# Altium PCB ESP32_C3_Breakout.PcbDoc
Units mm, origin at the board's own origin, x right, y up, seen from the top; angles counter-clockwise.
Board outline 103.38 x 55.12 mm, 2 copper layers (Top Layer, Bottom Layer); 77 components, 40 nets, 279 pads, 103 vias.
Unrouted connection lines stored in the file: 3.
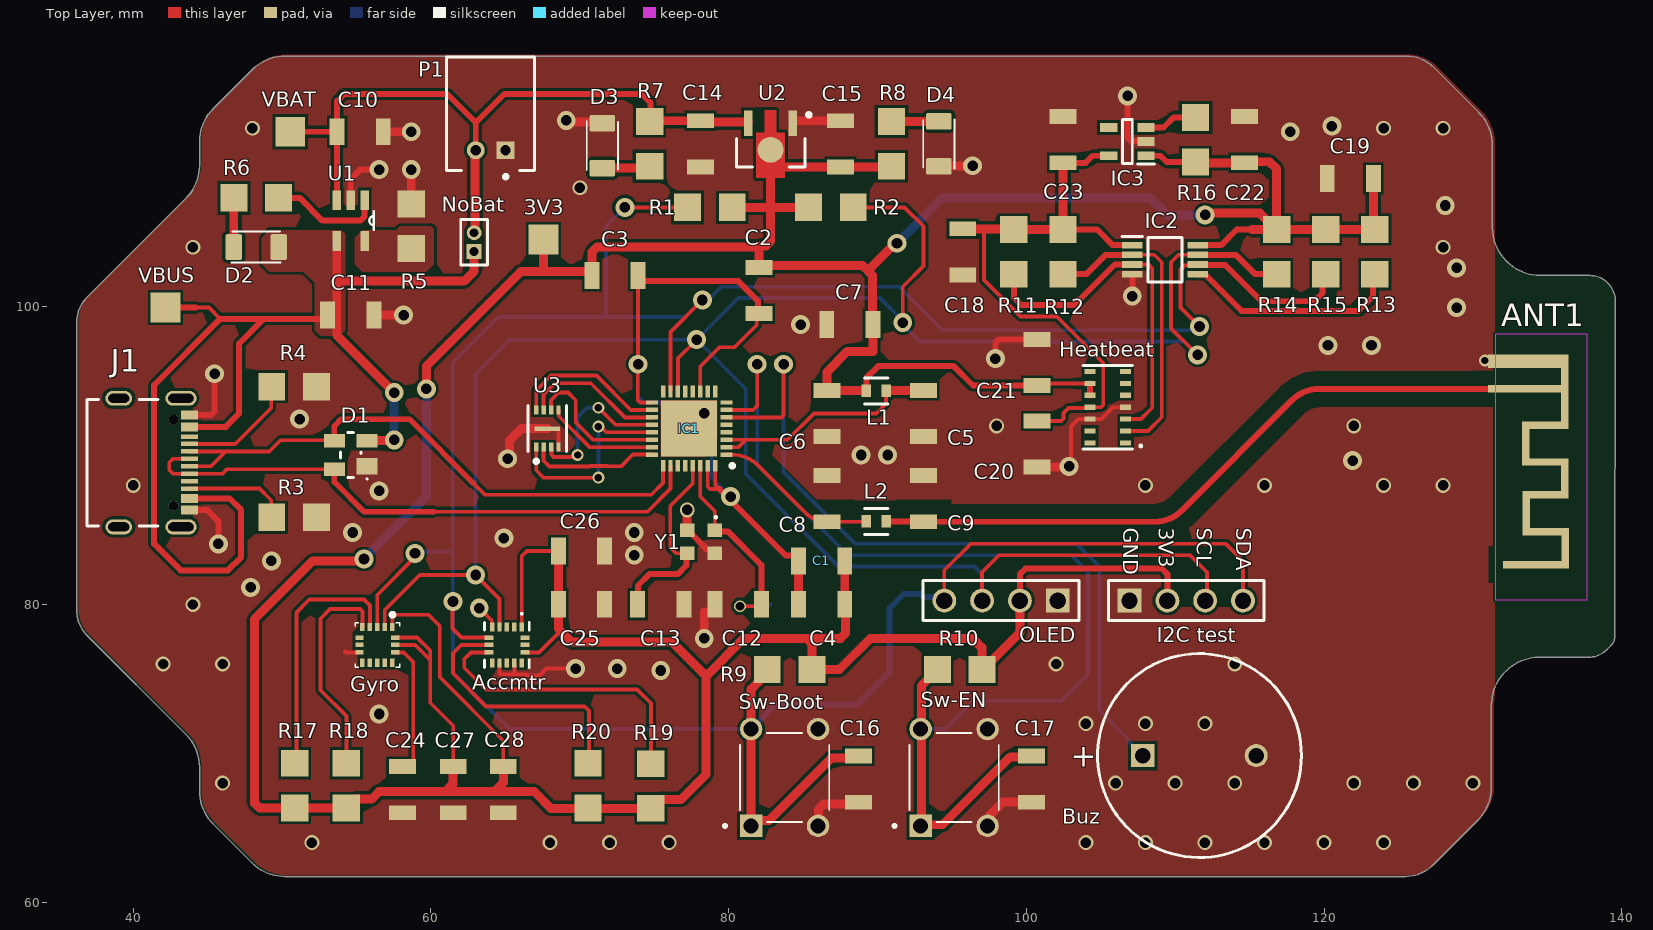
[diagram p0: Top Layer view]
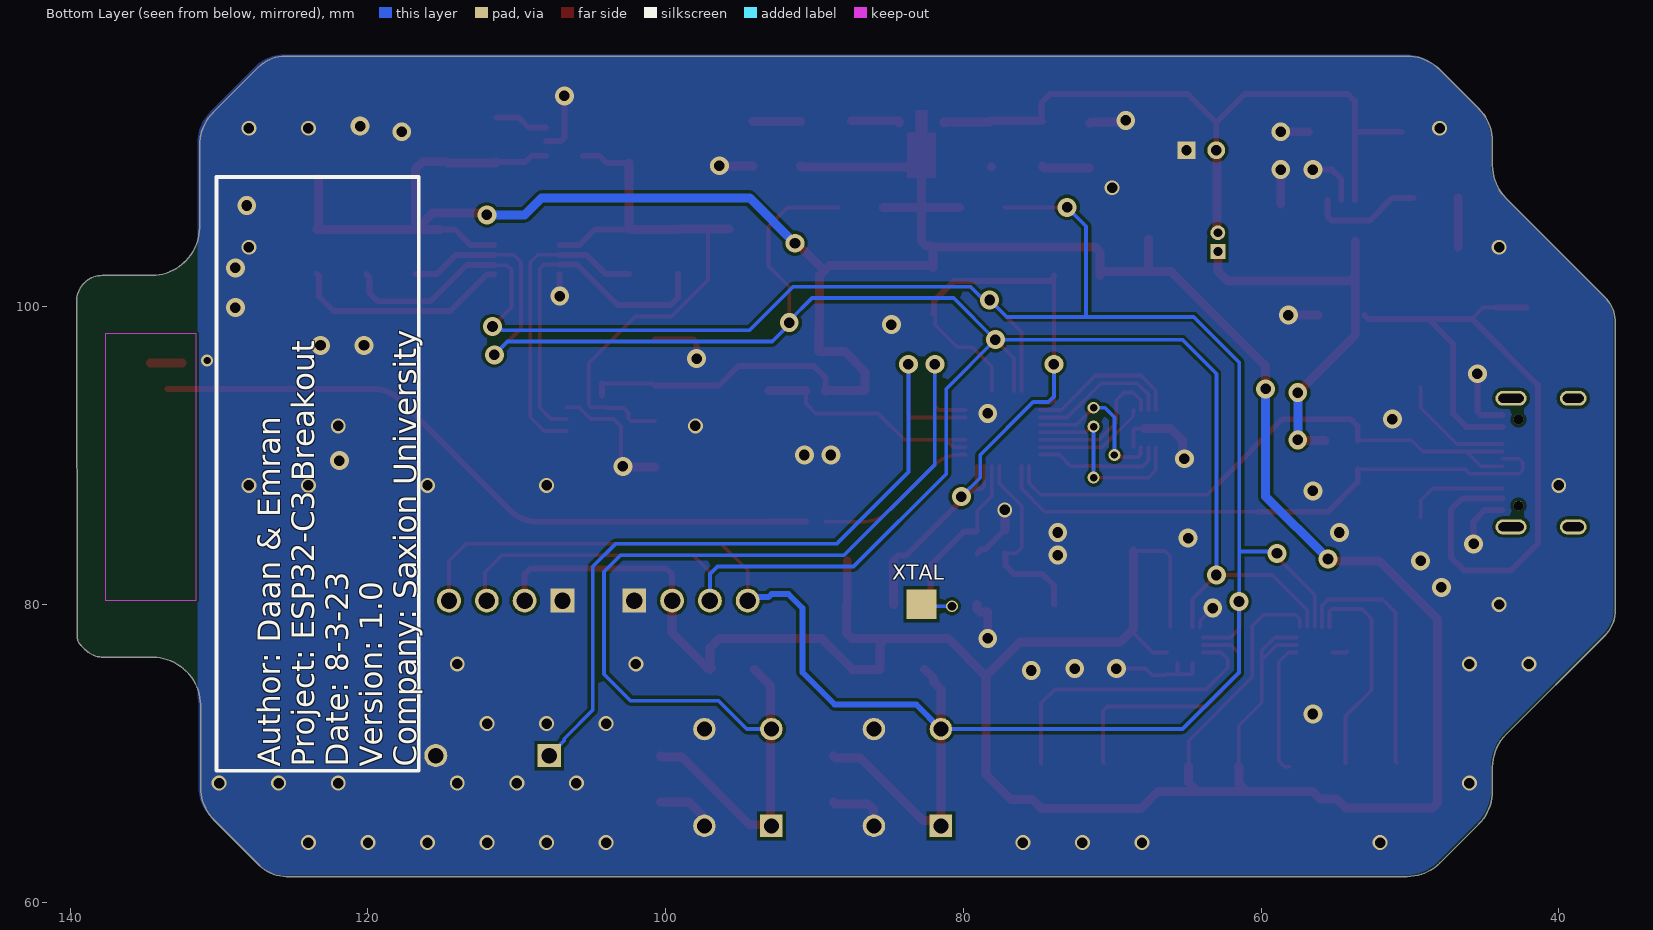
[diagram p1: Bottom Layer view, seen from below]
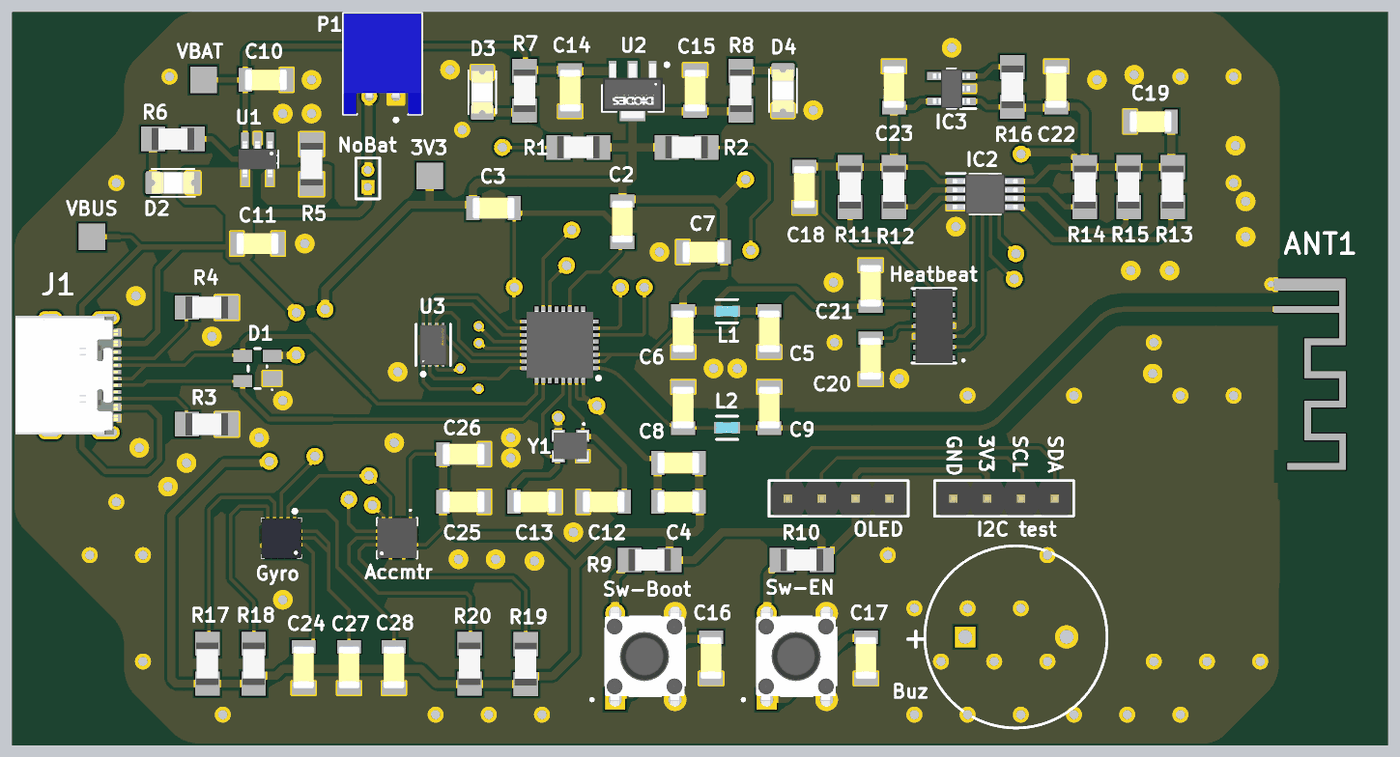
[diagram p2: 3D render of the assembled board from above, using the file's embedded part models]

## Layer stack, top to bottom
Top Solder: solder mask 0.0102, Solder Resist, Dk 3.5
Top Layer: signal copper 0.0356
Dielectric 1: dielectric 0.32, FR-4, Dk 4.8
Bottom Layer: signal copper 0.0356
Bottom Solder: solder mask 0.0102, Solder Resist, Dk 3.5

## Board outline
44.45,67.462 44.45,69.063 ccw(c41.323,69.063) 43.534,71.274 36.913,77.895 cw(c38.648,79.629) 36.195,79.629 36.195,98.933 cw(c38.648,98.933) 36.913,100.667 43.534,107.288 ccw(c41.323,109.499) 44.45,109.499 44.45,111.1 cw(c47.577,111.1) 45.366,113.311 47.979,115.924 cw(c50.19,113.713) 50.19,116.84 125.544,116.84 cw(c125.544,114.246) 127.379,116.08 130.402,113.057 cw(c128.191,110.846) 131.318,110.846 131.318,105.308 ccw(c134.445,105.308) 132.234,103.097 132.307,103.024 ccw(c134.518,105.235) 134.518,102.108 137.839,102.108 cw(c137.839,100.374) 139.065,101.6 cw(c137.839,100.374) 139.573,100.374 139.539,77.858 cw(c138.686,77.858) 139.29,77.255 139.216,77.182 139.07,77.035 138.997,76.962 cw(c137.77,78.188) 137.77,76.454 134.45,76.454 ccw(c134.45,73.327) 132.239,75.538 132.166,75.465 ccw(c134.377,73.254) 131.25,73.254 131.25,67.716 cw(c128.122,67.716) 130.334,65.505 127.311,62.482 cw(c125.476,64.316) 125.476,61.722 50.19,61.722 cw(c50.19,64.849) 47.979,62.638 45.366,65.251 cw(c47.577,67.462)

## Design rules (kind name [scope] priority, off if disabled: settings)
Clearance Clearance_2 [InNet('RF2') vs InNet('GND')] p1: gap=1 ignorepadtopadclearanceinfootprint=FALSE
Clearance Clearance_1 [InNet('RF1') vs InNet('GND')] p2: gap=1 ignorepadtopadclearanceinfootprint=FALSE
Clearance [All] p3: gap=0.2 ignorepadtopadclearanceinfootprint=FALSE
DiffPairsRouting [All] p1: maxlimit=0.254 minlimit=0.2 mostfreqgap=0.254 toplayer_minwidth=0.254 toplayer_maxwidth=0.381 toplayer_prefwidth=0.381 bottomlayer_minwidth=0.254 bottomlayer_maxwidth=0.381 bottomlayer_prefwidth=0.381 maxuncoupledlength=12.7
PolygonConnect [All] p1: connectstyle=Direct reliefconductorwidth=0.254 reliefentries=4 polygonreliefangle="90 Angle" airgapwidth=0.254
RoutingVias [All] p1: holewidth=0.711 width=1.27 viastyle="Through Hole" minholewidth=0.711 minwidth=1.27 maxholewidth=0.711 maxwidth=1.27
SolderMaskExpansion [All] p1: expansion=0.102 istentingtop=FALSE
Width [All] p1: maxlimit=0.6 minlimit=0.254 preferedwidth=0.4 minimp=50.000000 maximp=50.000000 favimp=50.000000
29 further rules are at their usual default settings.

## Classes and differential pairs
component class Sensors: Accmtr C18 C19 C20 C21 C22 C23 C24 C25 C26 C27 C28 Gyro Heatbeat IC2 IC3 R11 R12 R13 R14 R15 R16 R17 R18 R19 R20
component class IC_Schematic: 3V3 ANT1 Buz C1 C2 C3 C4 C5 C6 C7 C8 C9 C10 C11 C12 C13 C14 C15 C16 C17 D1 D2 D3 D4 "I2C test" IC1 J1 L1 L2 NoBat OLED P1 R1 R2 R3 R4 R5 R6 R7 R8 R9 R10 Sw-Boot Sw-EN U1 U2 U3 VBAT VBUS XTAL Y1
differential pair D_USB: +D_USB_P -D_USB_N

## Components (designator, comment, footprint, x,y, rotation, side; value= is the part's Value field where it differs from the comment)
3V3 "Pad" PAD_SQ_2MM#1 67.564,104.521 r0 top
Accmtr "LIS3DHTR" LIS3DHTR 65.104,77.28 r270 top (schematic designator AC1)
ANT1 "Antenna 2.4Ghz 50Ohm PCB" PCB_Antenna_2.4GHz_50Ohm 133.954,89.678 r270 top
Buz "KPEG242" KINGS-KPEG242-2 111.633,69.85 r0 top
C1 "10u" CAP_1206 86.252,82.931 r0 top
C2 "100n" CAP_1206 82.042,101.092 r90 top
C3 "100n" CAP_1206 72.364,102.108 r180 top
C4 "100n" CAP_1206 86.252,80.01 r0 top
C5 "100n" CAP_1206 93.091,92.837 r90 top
C6 "100n" CAP_1206 86.614,92.837 r90 top
C7 "10u" CAP_1206 88.138,98.806 r0 top
C8 "3p3" CAP_1206 86.614,87.109 r270 top
C9 "3p3" CAP_1206 93.091,87.109 r270 top
C10 "4u7" CAP_1206 55.245,111.76 r180 top
C11 "4u7" CAP_1206 54.61,99.441 r180 top
C12 "27p" CAP_1206 80.645,80.01 r0 top
C13 "27p" CAP_1206 75.438,80.01 r180 top
C14 "10u" CAP_1206 78.117,110.95 r90 top
C15 "22u" CAP_1206 87.515,110.95 r270 top
C16 "10n" CAP_1206 88.714,68.267 r90 top
C17 "10n" CAP_1206 100.354,68.267 r90 top
C18 "100n" CAP_1206 95.73,103.692 r90 top
C19 "100n" CAP_1206 121.765,108.621 r0 top
C20 "1u" CAP_1206 100.711,90.779 r90 top
C21 "1u" CAP_1206 100.711,96.266 r270 top
C22 "1u" CAP_1206 114.664,111.225 r270 top
C23 "1u" CAP_1206 102.461,111.225 r270 top
C24 "10n" CAP_1206 58.078,67.555 r270 top
C25 "10u" CAP_1206 70.109,80.01 r180 top
C26 "10u" CAP_1206 70.109,83.592 r180 top
C27 "10u" CAP_1206 61.5,67.555 r90 top
C28 "10u" CAP_1206 64.862,67.555 r90 top
D1 "SP0503BAHTG" LFUS-SOT143-4_V 54.61,90.043 r180 top
D2 "LED BAT" LED_1206 48.26,104.013 r0 top
D3 "LED VBUS" LED_1206 71.513,110.823 r270 top
D4 "LED 3.3V" LED_1206 94.119,110.95 r90 top
Gyro "L3GD20HTR" H3LIS100DLTR 56.398,77.28 r270 top (schematic designator IC5)
Heatbeat "MAX30102EFD+" 14-LEAD-OESIP 105.467,93.256 r180 top (schematic designator IC2)
"I2C test" "61300411121" 61300411121 110.744,80.264 r0 top
IC1 "ESP32-C3" QFN50P500X500X90-33N-D 77.343,91.821 r180 top
IC2 "PCA9517ADMR2G" SOP65P490X110-8N 109.319,103.167 r0 top
IC3 "LDLN025M18R" SOT95P280X145-5N 106.79,111.098 r180 top
J1 "USB4105-GF-A-060" USB4105-GF-A-060 41.402,89.535 r270 top
L1 "2n2" FP-LQW18AN_10-MFG 89.916,94.349 r180 top
L2 "2n2" FP-LQW18AN_10-MFG 89.916,85.585 r0 top
NoBat "VBUS" MHDR1X2 62.902,103.705 r90 top (schematic designator P2)
OLED "61300411121" 61300411121 98.298,80.264 r180 top (schematic designator OLED1)
P1 "Bat" JST-S2B-PH-K-S_V 64.008,112.973 r180 top
R1 "2k2" RES_1206 78.74,106.68 r180 top
R2 "2k2" RES_1206 86.868,106.68 r0 top
R3 "5k1" RES_1206 50.8,85.852 r180 top
R4 "5k1" RES_1206 50.8,94.635 r180 top
R5 "22k" RES_1206 58.674,105.41 r270 top
R6 "470" RES_1206 48.26,107.315 r180 top
R7 "10k" RES_1206 74.688,110.95 r90 top
R8 "10k" RES_1206 90.944,110.95 r270 top
R9 "10k" RES_1206 84.098,75.633 r180 top
R10 "10k" RES_1206 95.528,75.633 r180 top
R11 "10k" RES_1206 99.159,103.692 r270 top
R12 "10k" RES_1206 102.461,103.692 r270 top
R13 "10k" RES_1206 123.416,103.692 r270 top
R14 "10k" RES_1206 116.812,103.692 r270 top
R15 "10k" RES_1206 120.114,103.692 r270 top
R16 "10k" RES_1206 111.362,111.225 r90 top
R17 "10k" RES_1206 50.844,67.83 r270 top
R18 "10k" RES_1206 54.32,67.83 r270 top
R19 "4k7" RES_1206 74.776,67.806 r90 top
R20 "22k" RES_1206 70.549,67.83 r90 top
Sw-Boot "SWEN" "Switch/Button 4 Pin Through Hole" 83.758,68.378 r90 top (schematic designator S1)
Sw-EN "SWEN" "Switch/Button 4 Pin Through Hole" 95.148,68.378 r90 top (schematic designator S2)
U1 "MCP73831T-3ACI/OT" SOT95P270X145-5N 54.61,105.791 r270 top
U2 "AZ1117CR-3.3TRG1" FP-SOT89-MFG 82.816,110.696 r180 top
U3 "W25Q16JVUXIQ" FP-UX-MFG 67.818,91.821 r90 top
VBAT "Pad" PAD_SQ_2MM#1 50.546,111.76 r90 top
VBUS "Pad" PAD_SQ_2MM#1 42.164,99.949 r90 top
XTAL "Pad" PAD_SQ_2MM#2 82.804,80.01 r90 top
Y1 "8Z-40.000MAAJ-T" 8Z40000MAAJT 78.141,84.214 r180 top

## Footprints (in the part's own frame and the unit in brackets; to place one, negate y for a bottom-side part, rotate by r counter-clockwise, add the part's x,y. Pads: shape width x height; smd on the part's side, far side on the other; paste and mask are expansions set on the pad)
8Z40000MAAJT [mm]
  rect 1x0.9 smd: 1(-0.925,-0.775) 2(0.925,-0.775) 3(0.925,0.775) 4(-0.925,0.775)
  silkscreen extent -1.05,-1.7 -0.95,-1.6, body extent -1.34,-1.13 1.34,1.13, height 0.65
14-LEAD-OESIP [mm]
  rect 0.75x0.35 smd: 1(-1.2,2.4) 2(-1.2,1.6) 3(-1.2,0.8) 4(-1.2,0) 5(-1.2,-0.8) 6(-1.2,-1.6) 7(-1.2,-2.4) 8(1.2,-2.4) 9(1.2,-1.6) 10(1.2,-0.8) 11(1.2,0) 12(1.2,0.8) 13(1.2,1.6) 14(1.2,2.4)
  silkscreen extent -2.28,-2.8 1.65,2.8, body extent -1.4,-2.8 1.4,2.8, height 1.3
61300411121 [mm] "Pin Header, pitch 2.54 mm, THT, Vertical, single row, 4p"
  rect 1.6x1.6 hole 1.1: 1(-3.81,0)
  round 1.6 hole 1.1: 2(-1.27,0) 3(1.27,0) 4(3.81,0)
  silkscreen extent -5.23,-1.35 5.23,1.35, body extent -5.08,-1.27 5.08,1.27, height 8.57
CAP_1206 [mm]
  rect 1x1.8 smd: 1(-1.55,0) 2(1.55,0)
  body extent -1.6,-0.8 1.6,0.8, height 0.94
FP-LQW18AN_10-MFG [mm]
  rect 0.625x0.85 smd paste+0 mask+0: 1(-0.663,0) 2(0.663,0)
  silkscreen extent -0.8,-0.87 0.8,0.87, body extent -1.07,-0.65 1.07,0.65, height 0.25
FP-SOT89-MFG [mm]
  rect 0.58x1.73 smd paste+0 mask+0: 1(-1.5,-1.635) 3(1.5,-1.635)
  round 1.74 smd paste+0 mask+0: 2(0,0.146)
  Top Layer region: -0.38,-2.5 -0.38,-1 -0.967,-1 -0.967,2.03 0.967,2.03 0.967,-1 0.38,-1 0.38,-2.5
  silkscreen extent -2.7,-2.32 2.3,1.3, body extent -2.4,-2.6 2.4,2.13, height 0.25
FP-UX-MFG [mm]
  rect 0.6x0.3 smd paste-1000 mask-1000: 1(-1.25,0.75) 2(-1.25,0.25) 3(-1.25,-0.25) 4(-1.25,-0.75) 5(1.25,-0.75) 6(1.25,-0.25) 7(1.25,0.25) 8(1.25,0.75)
  rect 0.3x1.7 smd paste-1000 mask+0: 9(0,0)
  silkscreen extent -2.32,-1.3 1.55,1.3, body extent -1.75,-1.15 1.75,1.15, height 0.25
H3LIS100DLTR [mm]
  rect 0.55x0.3 smd: 1(-1.2,1) 2(-1.2,0.5) 3(-1.2,0) 4(-1.2,-0.5) 5(-1.2,-1) 9(1.2,-1) 10(1.2,-0.5) 11(1.2,0) 12(1.2,0.5) 13(1.2,1)
  rect 0.3x0.55 smd: 6(-0.5,-1.2) 7(0,-1.2) 8(0.5,-1.2) 14(0.5,1.2) 15(0,1.2) 16(-0.5,1.2)
  silkscreen extent -2.16,-1.5 1.5,1.5, body extent -1.5,-1.5 1.5,1.5, height 1
JST-S2B-PH-K-S_V [mm] "THD, 2-Leads, Body 7.6x5.9mm, Pitch 2mm"
  rect 1.2x1.2 hole 0.7: 1(-1,2.45)
  round 1.2 hole 0.7: 2(1,2.45)
  silkscreen extent -2.95,-3.8 2.95,4.35, body extent -2.95,-3.8 2.95,3.8, height 4.8
KINGS-KPEG242-2 [mm] "THD, 2-Leads, Dia 13.7mm, Pitch 7.62mm"
  rect 1.55x1.55 hole 1.05: 1(-3.81,0)
  round 1.55 hole 1.05: 2(3.81,0)
  silkscreen extent -6.85,-6.85 6.85,6.85, body extent -6.85,-6.85 6.85,6.85, height 7.6
LED_1206 [mm]
  rrect20% 1.1x1.73 smd: A(1.51,0) C(-1.51,0)
  silkscreen extent -1.65,-1.04 1.65,1.04, body extent -1.6,-0.8 1.6,0.8, height 1.1
LFUS-SOT143-4_V [mm] "SOT143, 4-Leads, Body 3.04x1.4mm, Pitch 1.90mm"
  rect 1.4x1.1 smd: 1(-1.1,0.75)
  rect 1.4x0.9 smd: 2(-1.1,-0.95) 3(1.1,-0.95) 4(1.1,0.95)
  silkscreen extent -1.15,-1.5 0.7,1.65, body extent -0.7,-1.52 0.7,1.52, height 1.22
LIS3DHTR [mm]
  rect 0.6x0.3 smd: 1(-1.2,1) 2(-1.2,0.5) 3(-1.2,0) 4(-1.2,-0.5) 5(-1.2,-1) 9(1.2,-1) 10(1.2,-0.5) 11(1.2,0) 12(1.2,0.5) 13(1.2,1)
  rect 0.3x0.6 smd: 6(-0.5,-1.2) 7(0,-1.2) 8(0.5,-1.2) 14(0.5,1.2) 15(0,1.2) 16(-0.5,1.2)
  silkscreen extent -2.16,-1.5 1.5,1.5, body extent -1.5,-1.5 1.5,1.5, height 1
MHDR1X2 [mm] "Connector; Header; 2 Position"
  rect 1x1 hole 0.6: 1(0,0)
  round 1 hole 0.6: 2(1.27,0)
  silkscreen extent -0.9,-0.9 2.17,0.9
PAD_SQ_2MM#1 [mm]
  rect 2x2 smd: 1(0,0)
PAD_SQ_2MM#2 [mm]
  rect 2x2 smd far side: 1(0,0)
PCB_Antenna_2.4GHz_50Ohm [mm]
  rect 0.5x4.9 smd paste+0: 1(-4.81,-0.477)
  rect 5x0.5 smd: 1(-4.623,2.214)
  rect 0.5x2.64 smd paste+0: 1(-2.375,0.674) 1(0.104,0.673) 1(2.307,0.686) 1(4.794,0.689)
  rect 2x0.5 smd: 1(-1.136,-0.397) 1(3.551,-0.38)
  rect 2.7x0.5 smd: 1(1.205,2.232) 1(5.894,2.251)
  rect 0.5x3.94 smd paste+0: 1(6.995,0.056)
  rect 0.9x4.9 smd paste+0: 2(-6.672,-0.471)
  Keep-Out Layer region: 9.398,-2.413 -8.509,-2.413 -8.509,3.683 9.398,3.683
QFN50P500X500X90-33N-D [mm]
  rect 0.8x0.3 smd: 1(-2.5,1.75) 2(-2.5,1.25) 3(-2.5,0.75) 4(-2.5,0.25) 5(-2.5,-0.25) 6(-2.5,-0.75) 7(-2.5,-1.25) 8(-2.5,-1.75) 17(2.5,-1.75) 18(2.5,-1.25) 19(2.5,-0.75) 20(2.5,-0.25) 21(2.5,0.25) 22(2.5,0.75) 23(2.5,1.25) 24(2.5,1.75)
  rect 0.3x0.8 smd: 9(-1.75,-2.5) 10(-1.25,-2.5) 11(-0.75,-2.5) 12(-0.25,-2.5) 13(0.25,-2.5) 14(0.75,-2.5) 15(1.25,-2.5) 16(1.75,-2.5) 25(1.75,2.5) 26(1.25,2.5) 27(0.75,2.5) 28(0.25,2.5) 29(-0.25,2.5) 30(-0.75,2.5) 31(-1.25,2.5) 32(-1.75,2.5)
  rect 3.75x3.75 smd: 33(0,0)
  silkscreen extent -3.03,2.38 -2.78,2.62, body extent -2.55,-2.55 2.55,2.55, height 0.9
RES_1206 [mm]
  rect 1.8x1.84 smd: 1(-1.5,0) 2(1.5,0)
  body extent -1.6,-0.83 1.6,0.83, height 0.57
SOP65P490X110-8N [mm]
  rect 1.4x0.45 smd: 1(-2.2,0.975) 2(-2.2,0.325) 3(-2.2,-0.325) 4(-2.2,-0.975) 5(2.2,-0.975) 6(2.2,-0.325) 7(2.2,0.325) 8(2.2,0.975)
  silkscreen extent -2.9,-1.5 1.15,1.55, body extent -2.45,-1.5 2.45,1.5, height 1.1
SOT95P270X145-5N [mil]
  rect 52x22 smd: 1(-54,37) 2(-54,0) 3(-54,-37) 4(54,-37) 5(54,37)
  silkscreen extent -25,49 25,61, body extent -53,-57 53,57, height 57
SOT95P280X145-5N [mm]
  rect 1.15x0.6 smd: 1(-1.25,0.95) 2(-1.25,0) 3(-1.25,-0.95) 4(1.25,-0.95) 5(1.25,0.95)
  silkscreen extent -1.83,-1.48 0.33,1.5, body extent -1.4,-1.48 1.4,1.48, height 1.45
"Switch/Button 4 Pin Through Hole" [mm]
  rect 1.508x1.508 / inner round 1.508 / far side rect 1.508x1.508 hole 1: 1(-3.25,2.25)
  round 1.508 hole 1: 2(3.25,2.25) 3(-3.25,-2.25) 4(3.25,-2.25)
  silkscreen extent -3.35,-3 3,4.1, body extent -3.95,-2.95 3.95,3.05, height 12
USB4105-GF-A-060 [mm]
  rect 0.6x1.15 smd mask+0.05: A1B12(-3.2,2.378) A4B9(-2.4,2.378) B1A12(3.2,2.378) B4A9(2.4,2.378)
  rect 0.3x1.15 smd mask+0.05: A5(-1.25,2.378) A6(-0.25,2.378) A7(0.25,2.378) A8(1.25,2.378) B5(1.75,2.378) B6(0.75,2.378) B7(-0.75,2.378) B8(-1.75,2.378)
  round 0.65 hole 0.65 unplated mask+0.05: MH(-2.89,1.303) MH(2.89,1.303)
  oval 1x2.1 hole 0.6 slot 1.7 at 90 deg: SH(-4.32,1.803) SH(4.32,1.803)
  oval 1x1.8 hole 0.6 slot 1.4 at 90 deg: SH(-4.32,-2.377) SH(4.32,-2.377)
  silkscreen extent -4.25,-4.5 4.25,0.25, body extent -4.47,-4.97 4.47,2.73, height 3.27

## Part data
3V3 VBAT VBUS XTAL: library part PAD_SQ_2MM, "Test Point Square 2mm"
Accmtr: "Accelerometer", Manufacturer_Name=STMicroelectronics, Mouser Part Number=511-LIS3DHTR, Arrow Part Number=LIS3DHTR, Arrow Price/Stock=https://www.arrow.com/en/products/lis3dhtr/stmicroelectronics, Datasheet Link=http://www.st.com/content/ccc/resource/technical/document/datasheet/3c/ae/50/85/d6/b1/46/fe/CD00274221.pdf/files/CD00274221.pdf/jcr:content/translations/en.CD00274221.pdf, Height=1mm, Manufacturer_Part_Number=LIS3DHTR, Mouser Price/Stock=https://www.mouser.co.uk/ProductDetail/STMicroelectronics/LIS3DHTR?qs=6la6oa3D8xzhXYax3cEo4w%3D%3D
ANT1: "ESP32 C3"
Buz: library part CMP-2000-06518-1, "Piezo Indicator, 4100 Hz, 3 to 16 V, -20 to 70 degC, 2-Pin THD, RoHS", Current - Max=7A, Frequency Range=3600to4600Hz, Manufacturer=KingstateElectronicsCorp., Maximum Resonant Frequency=4600Hz, Maximum Supply Current=7mA, Operating Temperature=-20to70°C, Package Description="2-Pin Through Hole Device, Body Dia 13.7 mm, Pitch 7.62 mm", PartNumber=KPE-242, Typical Operating Supply Voltage=12Vdc, Category=AudioIndicatorsandAlerts, Datasheet URL=https://datasheet.ciiva.com/11776/0900766b8068f3a2-11776713.pdf, Datasheet Version=01/2006, Manufacturer URL=http://www.kingstate.com.tw/index.php/en/, Minimum Sound Pressure=70dBA, Mounting=ThroughHole, Mounting Technology=ThroughHole, Package Reference=KPEG242, Product Diameter=13.7mm, Product Height=7.6mm, Technology=Piezo, Termination Method=Pin, Tone Mode=Continuous, Type=Indicator
C1 C2 C3 C4 C5 C6 C7 C8 C9 C10 C11 C12 C13 C14 C15 C16 C17 C24 C25 C26 C27 C28: library part CAP_1206_50V, "Capacitor SMD 1206 50V"
C18 C19 C20 C21 C22 C23: library part CAP_1206_16V, "Capacitor SMD 1206 16V"
D1: library part CMP-2000-05191-1, "TVS Diode Array, 30 pF, 30 KV, -40 to 85 degC, 4-Pin SOT143, RoHS, Tape and Reel", Capacitance Value=30pF, Clamping Voltage=8V, Leakage Current=0.1uA, Manufacturer=Littelfuse, Operating Temp Range=-40Cto85C, Operating Temperature Classification=Industrial, Operating Temperature Max Deg. C=85C, Operating Temperature Min Deg. C=-40C, Package / Case=SOT-143, Reverse Stand-off Voltage=5.5(Min)V, Working Voltage=5.5V, Working Voltage (Max)=5.5V(Min), Clamping Voltage (Max)=8V, Configuration=Triple, Datasheet URL=https://datasheet.ciiva.com/15143/getdatasheetpartid-116020-15143550.pdf, Datasheet Version=Dec-13, Direction Type=Uni-Directional, Leakage Current (Max)=0.1uA, Manufacturer URL=http://www.littelfuse.com/, Mounting=SurfaceMount, Mounting Style=SurfaceMount, Number of Elements=3, Package Type=SOT-143, Packaging=TapeandReel, Pin Count=3+Tab, Polarity=Uni-Directional, Product Depth (mm)=1.4mm, Product Height (mm)=1.05mm, Product Length (mm)=3.04mm, Rad Hardened=No, Suppressor Type=TVS
D2 D3 D4: library part "LED - 1206", "Yellow 587nm LED Indication - Discrete 2V 1206 _3216 Metric_", Package="1206 Lite-On", Availability=Unavailable, MF="Lite-On Inc.", MP=LTST-C230KSKT, Price=None, SnapEDA_Link=https://www.snapeda.com/parts/LTST-C230KSKT/Lite-On%20Inc./view-part/264912/?ref=snap
Gyro: "MEMS motion sensor: /  three-axis digital output gyroscope", Manufacturer_Name=STMicroelectronics, Mouser Part Number=511-L3GD20HTR, Arrow Part Number=L3GD20HTR, Arrow Price/Stock=https://www.arrow.com/en/products/l3gd20htr/stmicroelectronics, Datasheet Link=http://www.st.com/content/ccc/resource/technical/document/datasheet/35/b1/e0/39/71/57/43/01/DM00060659.pdf/files/DM00060659.pdf/jcr:content/translations/en.DM00060659.pdf, Height=1mm, Manufacturer_Part_Number=L3GD20HTR, Mouser Price/Stock=https://www.mouser.co.uk/ProductDetail/STMicroelectronics/L3GD20HTR?qs=7v3IMFVTeKNoM%2F2Sb4QSlQ%3D%3D
Heatbeat: "Integrated Circuit", Manufacturer_Name="Analog Devices", Mouser Part Number=700-MAX30102EFD+, Datasheet Link=https://datasheets.maximintegrated.com/en/ds/MAX30102.pdf, Manufacturer_Part_Number=MAX30102EFD+, Mouser Price/Stock=https://www.mouser.co.uk/ProductDetail/Maxim-Integrated/MAX30102EFD%2b?qs=nVS1qgv%252BQrk9UYEvS27V%2Fg%3D%3D
"I2C test" OLED: library part CMP-1502-01064-1, "THT Vertical Pin Header WR-PHD, Pitch 2.54 mm, Single Row, 4 pins", Contact Resistance=20mOhm, Manufacturer="Wurth Elektronik", Operating Temperature=-40to105degC, Rated Current=3A, Withstanding Voltage=500VAC, Working Voltage=250VAC, Datasheet URL=https://katalog.we-online.de/em/datasheet/6130xx11121.pdf, Gender=Male, Manufacturer URL=http://www.we-online.de, Mounting Technology=THT, Orientation=Vertical, Package Reference=61300411121, Packaging=Bag, Part Number=61300411121, Pin Number=4, Pitch=2.54mm, Publisher=WurthElektronik, Row Number=Single
IC1: "Integrated Circuit", Manufacturer_Name="Espressif Systems", Mouser Part Number=356-ESP32-C3, Datasheet Link=https://www.espressif.com/sites/default/files/documentation/esp32-c3_datasheet_en.pdf, Height=0.9mm, Manufacturer_Part_Number=ESP32-C3, Mouser Price/Stock=https://www.mouser.co.uk/ProductDetail/Espressif-Systems/ESP32-C3?qs=iLbezkQI%252BsiMXe7tMG%252Bo%2FA%3D%3D
IC2: "Integrated Circuit", Manufacturer_Name=onsemi, Mouser Part Number=863-PCA9517ADMR2G, Arrow Part Number=PCA9517ADMR2G, Arrow Price/Stock=https://www.arrow.com/en/products/pca9517admr2g/on-semiconductor?region=nac, Datasheet Link=https://www.arrow.com/en/products/pca9517admr2g/on-semiconductor, Height=1.1mm, Manufacturer_Part_Number=PCA9517ADMR2G, Mouser Price/Stock=https://www.mouser.co.uk/ProductDetail/onsemi/PCA9517ADMR2G?qs=tCMd4XlZ%2FiBws0nQ3cmpKw%3D%3D
IC3: "Integrated Circuit", Manufacturer_Name=STMicroelectronics, Mouser Part Number=511-LDLN025M18R, Arrow Part Number=LDLN025M18R, Arrow Price/Stock=https://www.arrow.com/en/products/ldln025m18r/stmicroelectronics, Datasheet Link=https://mouser.componentsearchengine.com/Datasheets/2/LDLN025M18R.pdf, Height=1.45mm, Manufacturer_Part_Number=LDLN025M18R, Mouser Price/Stock=https://www.mouser.co.uk/ProductDetail/STMicroelectronics/LDLN025M18R?qs=5aG0NVq1C4xLjfzI8y7cFQ%3D%3D
J1: "USB Connector Type C SMT 12 Pin", Manufacturer=GCT, Manufacturer Part Number=USB4105-GF-A-060
L1 L2: library part CMP-06042-001078-1, "Wire Wound RF Inductor for Automotive 2.2nH ±0.5nH 1400mA 0.018Ω 0603 (1608)"
NoBat: library part MHDR1X2, "Header, 2-Pin", LatestRevisionDate=17-Jul-2002, LatestRevisionNote="Re-released for DXP Platform.", Publisher="Altium Limited"
P1: library part CMP-1755-00004-1, "Male Header, Pitch 2 mm, 1 x 2 Position, Height 4.8 mm, Tail Length 3.4 mm, -25 to 85 degC, RoHS, Bulk", Capacitance="10 uF", Case\Package=Radial, Max Operating Temperature="85 degC", Min Operating Temperature="-40 degC", Package Quantity=200, Tolerance=20%, Voltage Rating="50 V", ComponentLink1Description=Datasheet, ComponentLink1URL=http://www.jst-mfg.com/product/pdf/eng/ePH.pdf, DatasheetVersion=Dec-12, Diameter="5 mm", Height="11 mm", Lead Pitch="2 mm", Length="11 mm", Mount="Through Hole", PackageDescription="Male Header, Pitch 2 mm, 1 x 2 Position, Height 4.8 mm, Tail Length 3.4 mm", PackageReference=S2B-PH-K-S, Packaging=Bulk, Pins=2, Radiation Hardening=No, REACH SVHC="No SVHC", RoHSCompliant=true, Voltage Rating (DC)="50 V"
R1 R2 R3 R4 R5 R6 R7 R8 R9 R10 R11 R12 R13 R14 R15 R16 R17 R18 R19 R20: library part RES_1206, "Resistor SMD 1206"
Sw-Boot Sw-EN: library part "Switch/Button 4 Pin Through Hole", "TS02-66-120-BK-260-LCR-D / 6 x 6 mm, 12 mm Actuator Height, 260 gf, Black, Long Crimped, Through Hole, SPST, Tactile Switch", Package=None, Availability="In Stock", Check_prices=https://www.snapeda.com/parts/TS02-66-120-BK-260-LCR-D/CUI+Devices/view-part/?ref=eda, CUI_purchase_URL=https://www.cuidevices.com/product/switches/tactile-switches/ts02-series?utm_source=snapeda.com&utm_medium=referral&utm_campaign=snapedaBOM, MF="CUI Devices", MP=TS02-66-120-BK-260-LCR-D, Price=None, Purchase-URL=https://pricing.snapeda.com/search/part/TS02-66-120-BK-260-LCR-D/?ref=eda, SnapEDA_Link=https://www.snapeda.com/parts/TS02-66-120-BK-260-LCR-D/CUI+Devices/view-part/?ref=snap
U1: "Charger IC Lithium Ion/Polymer SOT-23-5", Package="SOT-23-5 Microchip", Arrow_Electronics-Purchase-URL=https://snapeda.com/shop?store=Arrow+Electronics&id=1099789, MF=Microchip, Mouser-Purchase-URL=https://snapeda.com/shop?store=Mouser&id=1099789, MP=MCP73831T-3ACI/OT, SnapEDA_Link=https://www.snapeda.com/parts/MCP73831T-3ACI/OT/Microchip/view-part/1099789/?ref=snap
U2: library part CMP-12756-000007-1, "IC REG LINEAR 3.3V 800MA SOT89", Dropout Voltage=1.2V, Manufacturer="Diodes Inc.", Max Junction Temp=+125°C, Max Supply Voltage=15V, Nominal Supply Current=4mA, Output Current=1.35A, Output Voltage=3.3V, Package=SOT89, Temperature="-20°C to +125°C", Temperature Range Low=-20°C, Accuracy Percentage=1%, Automotive=No, Category=IC, ComponentLink2Description=Datasheet, ComponentLink2URL=https://www.diodes.com/assets/Datasheets/AZ1117C.pdf, Device Class L1="Integrated Circuits (ICs)", Device Class L2="Power Management ICs", Device Class L3="Voltage Regulators - Linear", Digikey Description="IC REG LINEAR 3.3V 800MA SOT89", Footprint Url=https://www.diodes.com/assets/Package-Files/SOT89.pdf, Height=1.6mm, Lead Free=Yes, Manufacturer Part Number=AZ1117CR-3.3TRG1, Mouser Description="DiodesZetex AZ1117CR-3.3TRG1, LDO Regulator, 800mA, 3.3 V, ±1% 3-Pin, SOT-89", Number Of Outputs=1, Octopart=https://octopart.com/az1117cr-3.3trg1-diodes+inc.-30954805, Output Type=Fixed, RoHS=TRUE, Temperature Range High=+125°C
U3: library part CMP-78876-000011-1, "IC FLASH 16MBIT SPI/QUAD 8USON", RoHS Compliant=Yes
Y1: "Crystal or Oscillator", Manufacturer_Name="TXC CORPORATION", Arrow Part Number=8Z-40.000MAAJ-T, Arrow Price/Stock=https://www.arrow.com/en/products/8z-40.000maaj-t/txc-corporation, Datasheet Link=https://www.farnell.com/datasheets/1041872.pdf, Height=0.55mm, Manufacturer_Part_Number=8Z-40.000MAAJ-T

## Via types
v1: diameter 1.27, hole 0.711, Top Layer to Bottom Layer, 58 vias
v2: diameter 1, hole 0.7, Top Layer to Bottom Layer, 39 vias
v3: diameter 0.8, hole 0.5, Top Layer to Bottom Layer, 5 vias
v4: diameter 0.8, hole 0.6, Top Layer to Bottom Layer, 1 vias

## Nets (pads, with @x,y where several pads share a name; then routed paths per layer and width w, separated by ;. In a path a pad name is that pad's centre, name@x,y a point inside that pad or via, vN(x,y) a via of type N, cw(c..) or ccw(c..) an arc to the next point about the centre after c; other vN are vias at no path point)
1.8V: C18.2 C20.2 C23.2 Heatbeat.11 IC2.1 IC3.5 R11.1 R12.1 | length 41.3
  Top Layer w0.254: 97.155,105.242 97.155,101.809 99.613,99.351 102.04,99.351 105.172,96.219 105.172,93.405 105.023,93.256 104.067,93.256 104.019,93.208 103.871,93.208 102.833,93.208 102.489,92.863 102.489,92.478 102.34,92.329 C20.2 ; 97.886,105.242 97.917,105.242
  Top Layer w0.4: R12.1 104.754,105.192 105.804,104.142 IC2.1 ; C23.2 103.97,109.675 104.443,110.148 IC3.5
  Top Layer w0.6: C18.2 97.155,105.242 97.886,105.242 ; 97.917,105.242 99.109,105.242 R11.1 R12.1 C23.2
3.3V: 3V3.1 "I2C test.2" Accmtr.1 Accmtr.14 C1.2 C2.2 C3.2 C4.2 C6.2 C7.2 C15.2 C19.2 C21.2 C22.2 C25.2 C26.2 C27.2 C28.2 Gyro.1 Gyro.15 Gyro.16 Heatbeat.9 Heatbeat.10 IC2.8 IC3.1 L1.2 OLED.2 R1.1 R2.1 R8.2 R9.1 R10.1 R13.1 R14.1 R15.1 R16.1 R17.2 R18.2 R19.1 R20.1 U2.2 | length 334.3
  Top Layer w0.254: Gyro.1 57.398,79.042 57.668,79.312 59.827,79.312 60.589,78.55 60.589,75.121 64.862,70.849 C28.2 ; Gyro.15 58.938,77.28 59.954,76.264 ; Gyro.16 57.606,77.788 59.065,77.788 59.954,76.899 59.954,76.264 ; C27.2 61.5,71.85 59.954,73.396 59.954,76.264 ; Accmtr.1 66.104,83.249 66.447,83.592 C26.2 ; Accmtr.14 67.255,76.78 68.559,78.084 68.559,78.38 ; C25.2 C25.2@68.583,80.034 ; C21.2 100.851,94.856 Heatbeat.9
  Top Layer w0.4: L1.2@89.253,94.374 89.253,95.222 90.046,96.015 95.12,96.015 96.419,94.716 C21.2 ; OLED.2 99.568,82.042 99.949,82.423 109.093,82.423 109.474,82.042 109.474,80.264 ; Heatbeat.10 Heatbeat.9 ; IC3.1 109.01,110.148 109.433,109.725 R16.1 ; IC2.8 113.088,104.142 114.137,105.192 115.161,105.192
  Top Layer w0.6: v1(55.499,83.058) 55.372,82.931 52.07,82.931 48.133,78.994 48.133,66.675 48.478,66.33 R17.2 R18.2 54.92,66.93 56.008,66.93 56.515,67.437 60.96,67.437 ; v1(59.69,94.488) 59.69,96.012 66.04,102.362 67.564,102.362 ; C27.2 61.468,69.073 61.468,67.945 60.96,67.437 ; C28.2 64.862,68.037 64.262,67.437 ; 3V3.1 67.564,102.362 ; C25.2 68.559,78.38 69.469,77.47 76.2,77.47 78.486,75.184 ; C25.2@68.583,80.034 C26.2@68.583,83.592 ; R20.1 R20.1@70.549,66.306 ; C3.2 C3.2@70.814,102.162 ; R1.1 82.816,106.68 ; 82.042,104.026 C2.2 82.169,102.769 89.001,102.769 89.163,102.607 ; 82.096,104.026 71.165,104.026 70.814,103.675 C3.2@70.814,102.162 ; 82.096,104.086 82.496,104.086 ; 82.538,104.128 82.816,104.406 82.816,106.68 ; U2.2 U2.2@82.816,109.751 ; R2.1 82.816,106.68 ; C1.2 C4.2 87.854,79.958 87.854,78.075 87.503,77.724 85.247,77.724 ; L1.2 89.253,94.374 89.241,94.387 C6.2 86.614,95.631 87.983,97 89.688,97 C7.2 89.662,98.832 89.662,102.108 89.344,102.425 ; 89.507,102.588 91.186,104.267 v1(91.313,104.267) ; R8.2 90.894,109.4 C15.2 83.167,109.4 U2.2@82.816,109.751 ; R10.1@96.935,75.746 R10.1@97.016,75.746 ; R10.1 97.016,75.645 R10.1@97.016,75.746 ; OLED.2 99.568,78.105 97.209,75.746 R10.1@97.016,75.746 ; R16.1 111.412,109.675 C22.2 114.734,109.745 116.33,109.745 116.812,109.263 R14.1 ; v1(112.014,106.172) 112.141,106.299 115.684,106.299 R14.1@116.792,105.192 ; 115.161,105.192 R14.1@116.792,105.192 ; C19.2 123.315,105.293 R13.1 R15.1 R14.1 ; 60.96,67.437 64.262,67.437 ; 64.262,67.437 66.929,67.437 68.06,66.306 R20.1@70.549,66.306 ; 67.564,102.362 70.614,102.362 C3.2@70.814,102.162 ; R20.1@70.549,66.306 R19.1 75.376,66.906 76.812,66.906 78.486,68.58 78.486,75.184 ; 78.486,75.184 81.026,77.724 85.247,77.724 ; 82.816,106.68 U2.2@82.816,109.751 ; 85.247,77.724 85.598,77.373 R9.1 87.444,75.633 89.535,77.724 96.393,77.724 97.016,77.101 R10.1@97.016,75.746 ; R14.1@116.792,105.192 R14.1
  Bottom Layer w0.6: v1(55.499,83.058) 59.69,87.249 v1(59.69,94.488) ; v1(91.313,104.267) 94.361,107.315 108.331,107.315 109.474,106.172 v1(112.014,106.172)
3.3V_RF: C5.2 IC1.2 IC1.3 L1.1 | length 16.7
  Top Layer w0.254: IC1.2 80.665,90.571 81.165,91.071 ; IC1.3 81.165,91.071 ; L1.1 90.579,93.5 89.916,92.837 85.725,92.837 83.959,91.071 81.165,91.071
  Top Layer w0.4: C5.2@93.072,94.368 C5.2
  Top Layer w0.6: L1.1 90.579,94.355 90.591,94.368 C5.2@93.072,94.368
Bat_Prog: R5.2 U1.5
D_USB_N: D1.3 IC1.25 J1.A7 J1.B7 | length 39.7
  Top Layer w0.254: J1.A7 45.216,89.285 46.216,90.285 ; J1.B7 46.216,90.285 ; D1.3@53.467,91.036 49.888,91.036 49.137,90.285 46.216,90.285 ; 62.865,88.138 63.627,87.376 74.803,87.376 75.593,88.166 IC1.25
  Top Layer w0.381: D1.3 53.51,91.991 53.975,92.456 58.547,92.456 62.865,88.138
D_USB_P: D1.4 IC1.26 J1.A6 J1.B6 | length 39.8
  Top Layer w0.254: J1.A6 43.016,89.785 43.012,89.789 42.672,89.789 42.418,89.535 42.418,89.027 42.66,88.785 J1.B6 45.986,88.785 46.294,89.093 D1.4 ; 60.198,86.233 74.549,86.233 76.101,87.785 IC1.26@76.101,89.313
  Top Layer w0.381: D1.4 53.51,88.222 55.499,86.233 60.198,86.233
EN: C17.2 IC1.7 R10.2 Sw-EN.1 Sw-EN.2 | length 77.2
  Top Layer w0.254: IC1.7 81.641,93.071 ; 81.641,93.079 81.649,93.079 81.915,93.345 v1(81.915,96.139)
  Top Layer w0.6: R10.2 94.028,75.613 92.943,74.528 92.943,71.672 Sw-EN.2 92.943,71.584 92.943,65.128 Sw-EN.1 93.111,64.915 93.397,65.201 94.367,65.201 98.932,69.766 100.303,69.766 C17.2
  Bottom Layer w0.254: v1(81.915,96.139) 81.915,89.408 88.011,83.312 103.029,83.312 104.14,82.201 104.14,75.311 102.362,73.533 96.458,73.533 94.553,71.628 Sw-EN.2
GND: "I2C test.1" Accmtr.5 Accmtr.10 Accmtr.12 ANT1.2 Buz.2 C5.1 C6.1 C7.1 C8.1 C9.1 C10.1 C11.1 C12.1 C13.1 C14.1 C15.1 C16.1 C17.1 C18.1 C19.1 C20.1 C21.1 C22.1 C23.1 C24.2 C25.1 C26.1 C27.1 C28.1 D1.1 D3.C D4.C Gyro.8 Heatbeat.4 Heatbeat.12 IC1.33 IC2.4 IC3.2 J1.A1B12 J1.B1A12 OLED.1 P1.1 R3.1 R4.1 R5.1 Sw-Boot.3 Sw-Boot.4 Sw-EN.3 Sw-EN.4 U1.2 U2.1 U3.4 U3.9 Y1.2 Y1.4 | length 77.1
  Top Layer w0.254: 54.229,76.835 54.284,76.78 Gyro.8 ; v1(63.246,79.756) 64.081,78.921 64.081,78.503 Accmtr.5 ; Accmtr.10 64.604,75.35 64.643,75.311 65.604,75.311 ; Accmtr.12 65.604,75.311 ; U3.9 68.518,91.821 68.568,91.771 U3.4 ; v1(69.723,75.692) 67.752,75.692 67.3,75.239 66.452,75.239 66.38,75.311 65.604,75.311 ; v1(102.87,89.281) 102.997,89.408 102.997,91.948 103.505,92.456 Heatbeat.12 105.029,92.456 105.829,93.256 Heatbeat.4
  Top Layer w0.4: J1.B1A12 44.983,86.335 45.72,85.598 v1(45.72,84.074) ; J1.A1B12 45.232,92.735 45.466,92.969 v1(45.466,95.504) ; U1.2 54.61,108.585 55.245,109.22 v1(56.515,109.22) ; Y1.2 77.266,84.989 78.566,83.689 78.816,83.689 Y1.4 ; v1(97.917,96.52) 97.917,97.582 98.151,97.816 C21.1 ; v1(106.807,114.173) 106.807,111.359 107.041,111.125 108.013,111.125 IC3.2 ; v1(107.119,100.713) IC2.4
  Top Layer w0.6: C11.1 v1(58.166,99.441) ; C10.1 v1(58.674,111.76) ; R5.1 v1(58.674,109.22) ; v1(65.151,89.789) 65.279,89.917 65.279,91.032 66.068,91.821 U3.9 ; v1(69.088,112.522) 69.182,112.428 71.419,112.428 D3.C ; Y1.2 v2(77.216,86.36) ; C14.1@78.105,109.388 C14.1 ; v1(78.359,77.724) 78.359,79.502 78.895,79.502 79.095,79.702 C12.1 ; U2.1 84.316,112.49 84.326,112.5 C15.1 ; Sw-Boot.3 86.037,65.157 86.037,66.238 86.389,66.59 88.587,66.59 C16.1 ; D4.C 94.136,109.457 96.376,109.457 v1(96.393,109.474) ; Sw-EN.3 97.572,65.302 97.572,65.866 98.423,66.717 C17.1 ; C20.1 v1@102.87,89.229 ; ANT1.2@132.508,96.219 ANT1.2@134.618,96.219
  other v1: 56.515,72.644 75.438,75.565 72.517,75.692 47.879,81.153 49.276,82.931 73.66,83.312 64.897,84.455 54.737,84.836 73.66,84.836 56.515,87.63 121.92,89.662 88.9,90.043 90.678,90.043 51.181,92.456 78.359,92.837 120.269,97.409 123.19,97.409 84.836,98.806 128.905,99.949 128.905,102.616 128.143,106.807 117.729,111.76 120.523,112.141
  other v2: 52,64 68,64 72,64 76,64 104,64 108,64 112,64 116,64 120,64 124,64 46,68 106,68 110,68 114,68 122,68 126,68 130,68 104,72 108,72 112,72 42,76 46,76 102,76 114,76 44,80 40,88 108,88 116,88 124,88 128,88 98,92 122,92 44,104 128,104 70,108 48,112 124,112 128,112
  other v3: 130.81,96.393
GPIO2: Buz.1 IC1.6 | length 52.3
  Top Layer w0.254: IC1.6 83.544,92.571 83.693,92.72 v1(83.693,96.139)
  Bottom Layer w0.254: v1(83.693,96.139) 83.693,88.9 88.519,84.074 103.371,84.074 104.902,82.543 104.902,72.901 106.817,70.986 106.817,70.856 Buz.1
GPIO9/SDA: "I2C test.4" Accmtr.6 C16.2 Gyro.3 IC1.15 IC2.6 OLED.4 R1.2 R9.2 R15.2 Sw-Boot.1 Sw-Boot.2 | length 210.5
  Top Layer w0.254: Gyro.3 56.398,80.655 58.928,83.185 v1(58.928,83.439) ; v1(61.478,80.201) 61.449,80.171 61.449,78.378 62.047,77.78 Accmtr.6 ; v1(73.025,106.68) 73.047,106.702 73.257,106.702 73.279,106.68 R1.2 ; IC1.15 76.093,98.318 v1(78.232,100.457) ; OLED.4 94.488,82.296 96.266,84.074 113.411,84.074 114.554,82.931 114.554,80.264 ; IC2.6 111.475,102.798 110.661,102.798 110.363,102.5 110.363,99.949 v1(111.633,98.679)
  Top Layer w0.4: IC2.6 111.544,102.817 113.352,102.817 115.796,100.373 119.352,100.373 119.905,100.926 119.905,101.983 R15.2
  Top Layer w0.6: R9.2 81.998,75.033 81.998,74.803 81.508,74.313 Sw-Boot.2 Sw-Boot.1 81.875,65.495 82.723,65.495 86.918,69.69 88.587,69.69 C16.2
  Bottom Layer w0.254: v1(58.928,83.439) 59.055,83.566 61.468,83.566 ; v1(73.025,106.68) 71.755,105.41 71.755,99.314 ; Sw-Boot.2 65.278,71.628 61.478,75.428 v1(61.478,80.201) 61.468,80.211 61.468,83.566 ; v1(111.633,98.679) 111.439,98.485 111.036,98.485 110.976,98.425 94.361,98.425 91.44,101.346 79.524,101.346 78.829,100.651 78.426,100.651 v1(78.232,100.457) 77.089,99.314 71.755,99.314 ; 61.468,83.566 61.468,96.266 64.516,99.314 71.755,99.314
  Bottom Layer w0.4: Sw-Boot.2 83.159,73.279 88.646,73.279 90.805,75.438 90.805,79.756 91.748,80.699 92.888,80.699 93.093,80.494 94.258,80.494 OLED.4
NetAccmtr_7: Accmtr.7 R20.2 | length 17.7
  Top Layer w0.254: Accmtr.7 62.04,77.28 61.478,76.718 61.478,75.375 63.701,73.152 70.333,73.152 70.622,72.863 70.622,69.404 R20.2
NetAccmtr_8: Accmtr.8 R19.2 | length 20
  Top Layer w0.254: Accmtr.8 62.683,76.78 62.24,76.337 62.24,75.756 63.701,74.295 73.847,74.295 74.776,73.367 R19.2
NetC1_1: C1.1 C2.1 C3.1 C4.1 IC1.11 IC1.17 IC1.31 IC1.32 | length 52.8
  Top Layer w0.254: v1@73.886,96.139 73.886,93.747 74.062,93.571 IC1.17 ; v1(73.914,96.139) C3.1 ; IC1.11 78.093,96 79.375,97.282 80.391,97.282 81.893,98.784 81.893,99.393 C2.1 ; IC1.31 78.593,87.906 78.742,87.757 79.375,87.757 79.093,88.039 IC1.32
  Top Layer w0.4: C3.1 73.914,102.027 74.214,101.727 80.645,101.727 81.964,100.408 81.964,99.73 ccw(c82.23,99.73) C2.1 ; 79.375,87.757 83.836,83.296 84.402,83.296 84.702,82.996 C1.1
  Top Layer w0.6: C4.1 C1.1
  Bottom Layer w0.254: v1(73.914,96.139) 73.914,93.98 74.295,93.599 75.311,93.599 78.867,90.043 78.867,88.519 v1(80.137,87.249)
NetC24_1: C24.1 Gyro.14 | length 9
  Top Layer w0.254: Gyro.14 58.168,76.78 58.811,76.137 58.811,69.478 58.438,69.105 C24.1
NetD2_C: D2.C R6.2 | length 3.3
  Top Layer w0.6: D2.C 46.75,107.305 R6.2
NetD3_A: D3.A R7.1 | length 3.2
  Top Layer w0.6: D3.A 74.551,109.313 R7.1
NetD4_A: D4.A R8.1 | length 3.2
  Top Layer w0.6: R8.1 90.954,112.46 D4.A
NetGyro_4: Gyro.4 R17.1 | length 17.1
  Top Layer w0.254: R17.1 50.971,69.457 50.971,79.473 51.826,80.328 55.509,80.328 55.898,79.939 Gyro.4
NetGyro_5: Gyro.5 R18.1 | length 14.7
  Top Layer w0.254: R18.1 54.32,72.5 52.578,74.242 52.578,79.048 53.223,79.693 55.249,79.693 55.398,79.544 Gyro.5
NetIC2_5: IC2.5 R13.2 | length 14.7
  Top Layer w0.4: IC2.5 111.544,102.167 112.019,102.167 114.467,99.719 122.316,99.719 123.289,100.692 123.289,102.065 R13.2
NetIC3_3: IC3.3 R16.2 | length 3.6
  Top Layer w0.4: IC3.3 109.215,112.048 109.892,112.725 R16.2
NetJ1_A5: J1.A5 R4.2 | length 7.9
  Top Layer w0.254: J1.A5 46.843,90.785 ; 46.843,90.793 46.851,90.793 49.265,93.207 49.265,94.599 R4.2
NetJ1_B5: J1.B5 R3.2 | length 7
  Top Layer w0.254: J1.B5 48.486,87.785 49.267,87.004 49.267,85.885 R3.2
NetR6_1: R6.1 U1.1 | length 7.6
  Top Layer w0.4: R6.1 51.181,107.315 52.705,105.791 55.245,105.791 55.55,106.096 U1.1
RF1: C8.2 IC1.1 L2.1 | length 11.1
  Top Layer w0.254: IC1.1 80.2,90.071 cw(c80.2,87.531) 81.996,89.327 85.189,86.134 ; 85.19,86.133 ccw(c86.576,87.519) 85.839,85.703 85.841,85.703 86.576,85.559 89.191,85.559 ccw(c89.191,85.647) L2.1
RF2: ANT1.1 C9.2 L2.2 | length 46.4
  Top Layer w0.4: L2.2 93.028,85.585 cw(c93.028,85.496) C9.2 108.637,85.559 ccw(c108.637,88.099) 110.433,86.303 117.874,93.744 cw(c119.67,91.948) 119.67,94.488 ANT1.1@133.477,94.488
SCL: "I2C test.3" Accmtr.4 Gyro.2 IC1.14 IC2.7 OLED.3 R2.2 R14.2 | length 160.1
  Top Layer w0.254: Gyro.2 56.898,79.631 59.246,81.979 v1(63.002,81.979) 64.604,80.378 Accmtr.4 ; IC1.14 76.593,96.532 ; 76.601,96.532 76.601,96.54 v1(77.851,97.79) ; R2.2 91.821,106.68 93.091,105.41 93.091,102.743 91.694,101.346 v1(91.694,98.933) ; OLED.3 97.028,82.169 98.171,83.312 110.998,83.312 112.141,82.169 112.141,80.391 112.014,80.264 ; v1(111.506,96.774) 109.728,98.552 109.728,102.997 110.223,103.492 IC2.7
  Top Layer w0.4: IC2.7 114.074,103.492 115.374,102.192 R14.2
  Bottom Layer w0.254: v1(63.002,81.979) 62.992,81.989 62.992,95.504 65.278,97.79 v1(77.851,97.79) ; OLED.3 97.028,82.042 96.52,82.55 87.376,82.55 81.153,88.773 81.153,94.488 v1(77.851,97.79) ; v1(111.506,96.774) 110.617,97.663 92.837,97.663 91.694,98.806 v1(91.694,98.933) 91.694,99.06 90.17,100.584 80.645,100.584 v1(77.851,97.79)
SCL_HRS: Heatbeat.2 IC2.2 R12.2 | length 20.6
  Top Layer w0.254: Heatbeat.2 108.166,91.656 109.093,92.583 109.093,102.997 108.598,103.492 IC2.2
  Top Layer w0.4: R12.2 104.025,102.192 105.326,103.492 IC2.2
SDA_HRS: Heatbeat.3 IC2.3 R11.2 | length 23.8
  Top Layer w0.254: Heatbeat.3 107.696,92.456 108.458,93.218 108.458,102.583 108.2,102.842 IC2.3
  Top Layer w0.4: R11.2 99.159,100.627 99.667,100.119 103.223,100.119 105.946,102.842 IC2.3
SPI_CLK: IC1.22 U3.6 | length 9.8
  Top Layer w0.254: U3.6 68.068,93.722 68.58,94.234 69.215,94.234 69.723,93.726 69.723,92.224 70.876,91.071 IC1.22
SPI_CS0: IC1.21 U3.1 | length 13.1
  Top Layer w0.254: U3.1 67.068,89.015 67.564,88.519 v3(71.247,88.519) ; v3(71.247,91.948) 71.395,91.948 71.776,91.567 74.839,91.567 IC1.21
  Bottom Layer w0.254: v3(71.247,88.519) v3(71.247,91.948)
SPI_DI: IC1.23 U3.5 | length 7.6
  Top Layer w0.254: U3.5 68.568,92.91 68.58,92.898 68.58,92.648 70.657,90.571 IC1.23
SPI_DO: IC1.24 U3.2 | length 8.7
  Top Layer w0.254: U3.2 67.568,89.658 67.964,89.262 70.663,89.262 70.701,89.3 71.838,89.3 71.857,89.281 72.771,89.281 73.561,90.071 IC1.24
SPI_Hold: IC1.19 U3.7 | length 9.6
  Top Layer w0.254: U3.7 67.568,94.111 68.326,94.869 70.739,94.869 73.037,92.571 IC1.19
SPI_VCC: IC1.18 U3.8 | length 10.4
  Top Layer w0.254: U3.8 67.068,94.373 68.072,95.377 71.12,95.377 73.426,93.071 IC1.18
SPI_Wp: IC1.20 U3.3 | length 10.7
  Top Layer w0.254: U3.3 68.091,90.548 68.091,90.065 68.24,89.916 69.723,89.916 v3(69.85,90.043) ; v3(71.247,93.218) 72.394,92.071 IC1.20
  Bottom Layer w0.254: v3(69.85,90.043) 69.85,92.583 70.485,93.218 v3(71.247,93.218)
VBAT: C10.2 C14.2 NoBat.2 P1.2 R7.2 U1.3 U2.3 VBAT.1 | length 48.3
  Top Layer w0.4: VBAT.1 C10.2 ; U1.3 53.683,107.175 53.683,111.748 C10.2 ; P1.2 63.008,112.379 ; R7.2@74.738,112.5 74.738,113.73 74.168,114.3 64.929,114.3 63.008,112.379 ; C10.2 53.695,113.818 54.177,114.3 61.087,114.3 63.008,112.379
  Top Layer w0.6: NoBat.2 62.955,105.028 62.955,110.47 P1.2 ; R7.2@74.738,112.5 C14.2 78.201,112.416 81.306,112.416 81.316,112.406 U2.3
VBUS: C11.2 D1.2 D2.A J1.A4B9 J1.B4A9 NoBat.1 U1.4 VBUS.1 | length 80.7
  Top Layer w0.254: 44.196,99.949 45.085,99.949 45.847,99.187
  Top Layer w0.4: VBUS.1 44.196,99.949 ; J1.B4A9 46.469,87.135 47.244,86.36 47.244,83.185 46.355,82.296 43.18,82.296 41.402,84.074 41.402,94.742 45.847,99.187 48.768,99.187 ; J1.A4B9 46.215,91.935 47.117,92.837 47.117,97.536 48.768,99.187 ; C11.2 52.806,99.187 48.768,99.187
  Top Layer w0.6: U1.4 53.67,102.078 ; D1.2 55.743,91.026 57.498,91.026 v1(57.531,91.059) ; v1(57.531,94.234) 53.67,98.095 53.67,102.078 ; NoBat.1 62.902,102.399 62.23,101.727 54.022,101.727 53.67,102.078
  Bottom Layer w0.6: v1(57.531,91.059) v1(57.531,94.234)
XTAL_N: C13.2 IC1.29 Y1.3 | length 13.4
  Top Layer w0.254: Y1.3 77.069,83.439 76.454,83.439 76.073,83.82 76.073,86.614 77.593,88.134 IC1.29
  Top Layer w0.4: C13.2 73.91,80.032 73.91,81.276 74.676,82.042 76.581,82.042 77.162,82.623 77.162,83.385 Y1.3
XTAL_P: C12.2 IC1.30 XTAL.1 Y1.1 | length 15
  Top Layer w0.254: IC1.30 78.093,87.261 79.066,86.288 Y1.1 ; v4(80.772,79.883) 82.068,79.883 C12.2
  Top Layer w0.4: Y1.1 79.141,84.914 79.932,84.914 82.195,82.651 C12.2
  Bottom Layer w0.254: v4(80.772,79.883) 82.677,79.883 XTAL.1
pads on no net: Accmtr.2 Accmtr.3 Accmtr.9 Accmtr.11 Accmtr.13 Accmtr.15 Accmtr.16 Gyro.6 Gyro.7 Gyro.9 Gyro.10 Gyro.11 Gyro.12 Gyro.13 Heatbeat.1 Heatbeat.5 Heatbeat.6 Heatbeat.7 Heatbeat.8 Heatbeat.13 Heatbeat.14 IC1.4 IC1.5 IC1.8 IC1.9 IC1.10 IC1.12 IC1.13 IC1.16 IC1.27 IC1.28 IC3.4 J1.A8 J1.B8 J1.MH J1.SH
copper on no net: | length 0.4
  Top Layer w0.254: 82.068,79.883 82.195,80.01
  Bottom Layer w0.254: 82.677,79.883 82.804,80.01

## Polygon pours and split planes (outlines as drawn)
GND on Top Layer "GND_L01_P015" (solid, remove dead copper, pour order 15): 43.676,71.374 37.055,77.994 cw(c38.79,79.729) 36.337,79.729 36.337,99.033 cw(c38.79,99.033) 37.055,100.767 43.676,107.388 ccw(c41.465,109.599) 44.592,109.599 44.592,111.199 cw(c47.719,111.199) 45.508,113.411 48.121,116.024 cw(c50.332,113.813) 50.332,116.94 125.686,116.94 cw(c125.686,114.345) 127.521,116.18 130.544,113.157 cw(c128.333,110.945) 131.46,110.945 131.46,73.519 cw(c131.227,73.519) 131.392,73.353 131.392,67.816 cw(c128.264,67.816) 130.476,65.605 127.453,62.582 cw(c125.618,64.416) 125.618,61.822 50.332,61.822 cw(c50.332,64.949) 48.121,62.738 45.508,65.351 cw(c47.719,67.562) 44.592,67.562 44.592,69.162 ccw(c41.465,69.162)
GND on Top Layer "NONET_L02_P-001" (solid, pour order 11): 85.281,91.948 85.534,92.202 85.788,92.202 94.297,92.202 94.551,91.948 94.551,90.678 94.297,90.424 85.534,90.424 85.281,90.678
GND on Top Layer "NONET_L02_P-001" (solid, pour order 4): 78.613,84.074 78.359,83.82 78.359,81.788 77.724,81.153 76.454,81.153 76.2,80.899 76.2,78.994 76.454,78.74 79.629,78.74 79.883,78.994 79.883,83.82 79.629,84.074 79.121,84.074
GND on Top Layer "NONET_L02_P-001" (solid, pour order 2): 85.153,89.395 85.407,89.649 85.661,89.649 94.17,89.649 94.424,89.395 94.424,88.125 94.17,87.871 85.407,87.871 85.153,88.125
VBUS on Top Layer "NONET_L02_P-001" (solid, pour order 1): 48.641,102.87 49.149,102.362 51.435,102.362 52.197,101.6 52.197,98.425 52.578,98.044 53.848,98.044 54.229,98.425 54.229,104.902 53.975,105.156 49.149,105.156 48.641,104.648
Bat_Prog on Top Layer "NONET_L02_P-001" (solid, pour order 0): 60.198,105.283 60.198,102.87 59.69,102.362 55.372,102.362 54.864,102.87 54.864,104.648 55.372,105.156 57.658,105.156 57.912,105.41 59.944,105.41
GND on Bottom Layer "GND_L02_P014" (solid, pour order 14): 43.661,71.376 37.04,77.996 cw(c38.775,79.731) 36.322,79.731 36.322,99.035 cw(c38.775,99.035) 37.04,100.769 43.661,107.39 ccw(c41.45,109.601) 44.577,109.601 44.577,111.201 cw(c47.704,111.201) 45.493,113.413 48.106,116.026 cw(c50.317,113.814) 50.317,116.942 125.671,116.942 cw(c125.671,114.347) 127.506,116.182 130.529,113.159 cw(c128.318,110.947) 131.445,110.947 131.445,73.52 cw(c131.212,73.52) 131.377,73.355 131.377,67.818 cw(c128.249,67.818) 130.461,65.607 127.438,62.583 cw(c125.603,64.418) 125.603,61.824 50.317,61.824 cw(c50.317,64.951) 48.106,62.74 45.493,65.353 cw(c47.704,67.564) 44.577,67.564 44.577,69.164 ccw(c41.45,69.164)

## Silkscreen, mask and mechanical layers (free items; w line width, h text height)
Top Overlay:
  text "GND" at 106.499,85.144 h1 r270
  text "3V3" at 108.912,85.144 h1 r270
  text "SCL" at 111.452,85.144 h1 r270
  text "SDA" at 114.119,85.144 h1 r270
Bottom Overlay:
  lines w0.254: 116.586,68.834 116.586,108.712 130.175,108.712 130.175,68.834 116.586,68.834
  text "Author: Daan & Emran / Project: ESP32-C3 Breakout / Date: 8-3-23 / Version: 1.0 / Company: Saxion University" at 116.742,69.088 h1.52 r270
Mechanical 1:
  the board outline again, w0.1
PCB Border:
  lines w0.254: 127.311,62.482 130.334,65.505 ccw(c128.122,67.716) 131.25,67.716 131.25,73.254 cw(c134.377,73.254) 132.166,75.465 132.239,75.538 cw(c134.45,73.327) 134.45,76.454 137.77,76.454 ccw(c137.77,78.188) 138.997,76.962 139.07,77.035 ; 127.311,62.482 cw(c125.476,64.316) 125.476,61.722 50.19,61.722 cw(c50.19,64.849) 47.979,62.638 45.366,65.251 cw(c47.577,67.462) 44.45,67.462 44.45,69.063 ccw(c41.323,69.063) 43.534,71.274 36.913,77.895 cw(c38.648,79.629) 36.195,79.629 36.195,89.281 36.195,98.933 cw(c38.648,98.933) 36.913,100.667 43.534,107.288 ccw(c41.323,109.499) 44.45,109.499 44.45,111.1 cw(c47.577,111.1) 45.366,113.311 47.979,115.924 cw(c50.19,113.713) 50.19,116.84 125.544,116.84 cw(c125.544,114.246) 127.379,116.08 130.402,113.057 cw(c128.191,110.846) 131.318,110.846 131.318,105.308 ccw(c134.445,105.308) 132.234,103.097 132.307,103.024 ccw(c134.518,105.235) 134.518,102.108 137.839,102.108 cw(c137.839,100.374) 139.065,101.6 cw(c137.839,100.374) 139.573,100.374 139.539,77.858 cw(c138.686,77.858) 139.29,77.255 139.216,77.182 139.07,77.035 ; 139.07,77.035 139.07,77.035

## Text inside footprints (layer, text, board x,y; h text height)
Buz: Top Overlay "+" at 102.997,69.088 h1.52